# EAGLE board CT_schematic (EAGLE 7.6.0)

Size 100 x 80 mm. Coordinates in mm from the lower left corner, seen from the top.
Outline: 0,0 100,0 100,80 0,80 0,0
Copper layers (1*16): Top 0.035mm / dielectric 1.5mm / Bottom 0.035mm
Design rules "default": minimum track width 10mil, minimum drill 24mil, track to track 8mil, track to pad 8mil, pad to pad 8mil, via to via 8mil, smd to smd 8mil, copper to edge 40mil, drill to drill 8mil, minimum pad ring 10mil, minimum via ring 8mil, stop-mask expansion 4mil, vias tented up to drill 0mil, thermal gap 10mil

## Footprints (pad centres in the part's own frame; a part is rotated, then mirrored left to right if it is on the bottom)
C0603 = smd 0.8 x 0.8: 1 -0.762,0; 2 0.762,0
C0402 = smd 0.5 x 0.5: 1 -0.508,0; 2 0.508,0
C0805 = smd 1.2 x 1.3: 1 -1.016,0; 2 1.016,0
C1210 = smd 1.2 x 2.5: 1 -1.524,0; 2 1.524,0
C1206 = smd 1.3 x 1.6: 1 -1.524,0; 2 1.524,0
L0603 = smd 0.8 x 0.8: 1 -0.762,0; 2 0.762,0
DR1040 = smd 1.6 x 3.2: 1 -4.458,0; 2 4.458,0
R0603 = smd 0.8 x 0.8: 1 -0.762,0; 2 0.762,0
UFBGA132 = smd 0.32 x 0.32: A1 -2.75,2.75; A2 -2.25,2.75; A3 -1.75,2.75; A4 -1.25,2.75; A5 -0.75,2.75; A6 -0.25,2.75; A7 0.25,2.75; A8 0.75,2.75; A9 1.25,2.75; A10 1.75,2.75; A11 2.25,2.75; A12 2.75,2.75; B1 -2.75,2.25; B2 -2.25,2.25; B3 -1.75,2.25; B4 -1.25,2.25; B5 -0.75,2.25; B6 -0.25,2.25; B7 0.25,2.25; B8 0.75,2.25; B9 1.25,2.25; B10 1.75,2.25; B11 2.25,2.25; B12 2.75,2.25; C1 -2.75,1.75; C2 -2.25,1.75; C3 -1.75,1.75; C4 -1.25,1.75; C5 -0.75,1.75; C6 -0.25,1.75; C7 0.25,1.75; C8 0.75,1.75; C9 1.25,1.75; C10 1.75,1.75; C11 2.25,1.75; C12 2.75,1.75; D1 -2.75,1.25; D2 -2.25,1.25; D3 -1.75,1.25; D4 -1.25,1.25; D5 -0.75,1.25; D6 -0.25,1.25; D7 0.25,1.25; D8 0.75,1.25; D9 1.25,1.25; D10 1.75,1.25; D11 2.25,1.25; D12 2.75,1.25; E1 -2.75,0.75; E2 -2.25,0.75; E3 -1.75,0.75; E4 -1.25,0.75; E9 1.25,0.75; E10 1.75,0.75; E11 2.25,0.75; E12 2.75,0.75; F1 -2.75,0.25; F2 -2.25,0.25; F3 -1.75,0.25; F4 -1.25,0.25; F6 -0.25,0.25; F7 0.25,0.25; F9 1.25,0.25; F10 1.75,0.25; F11 2.25,0.25; F12 2.75,0.25; G1 -2.75,-0.25; G2 -2.25,-0.25; G3 -1.75,-0.25; G4 -1.25,-0.25; G6 -0.25,-0.25; G7 0.25,-0.25; G9 1.25,-0.25; G10 1.75,-0.25; G11 2.25,-0.25; G12 2.75,-0.25; H1 -2.75,-0.75; H2 -2.25,-0.75; H3 -1.75,-0.75; H4 -1.25,-0.75; H9 1.25,-0.75; H10 1.75,-0.75; H11 2.25,-0.75; H12 2.75,-0.75; J1 -2.75,-1.25; J2 -2.25,-1.25; J3 -1.75,-1.25; J4 -1.25,-1.25; J5 -0.75,-1.25; J6 -0.25,-1.25; J7 0.25,-1.25; J8 0.75,-1.25; J9 1.25,-1.25; J10 1.75,-1.25; J11 2.25,-1.25; J12 2.75,-1.25; K1 -2.75,-1.75; K2 -2.25,-1.75; K3 -1.75,-1.75; K4 -1.25,-1.75; K5 -0.75,-1.75; K6 -0.25,-1.75; K7 0.25,-1.75; K8 0.75,-1.75; K9 1.25,-1.75; K10 1.75,-1.75; K11 2.25,-1.75; K12 2.75,-1.75; L1 -2.75,-2.25; L2 -2.25,-2.25; L3 -1.75,-2.25; L4 -1.25,-2.25; L5 -0.75,-2.25; L6 -0.25,-2.25; L7 0.25,-2.25; L8 0.75,-2.25; L9 1.25,-2.25; L10 1.75,-2.25; L11 2.25,-2.25; L12 2.75,-2.25; M1 -2.75,-2.75; M2 -2.25,-2.75; M3 -1.75,-2.75; M4 -1.25,-2.75; M5 -0.75,-2.75; M6 -0.25,-2.75; M7 0.25,-2.75; M8 0.75,-2.75; M9 1.25,-2.75; M10 1.75,-2.75; M11 2.25,-2.75; M12 2.75,-2.75
ESP8266-12E = smd 2 x 1.2: 1 -7.5,7; 2 -7.5,5; 3 -7.5,3; 4 -7.5,1; 5 -7.5,-1; 6 -7.5,-3; 7 -7.5,-5; 8 -7.5,-7; 15 7.5,-7; 16 7.5,-5; 17 7.5,-3; 18 7.5,-1; 19 7.5,1; 20 7.5,3; 21 7.5,5; 22 7.5,7 | smd 1.1 x 1.7: 9 -5,-8.5; 10 -3,-8.5; 11 -1,-8.5; 12 1,-8.5; 13 3,-8.5; 14 5,-8.5
TFBGA-153 = smd 0.3 x 0.3: A1 -3.25,3.25; A2 -2.75,3.25; A3 -2.25,3.25; A4 -1.75,3.25; A5 -1.25,3.25; A6 -0.75,3.25; A7 -0.25,3.25; A8 0.25,3.25; A9 0.75,3.25; A10 1.25,3.25; A11 1.75,3.25; A12 2.25,3.25; A13 2.75,3.25; A14 3.25,3.25; B1 -3.25,2.75; B2 -2.75,2.75; B3 -2.25,2.75; B4 -1.75,2.75; B5 -1.25,2.75; B6 -0.75,2.75; B7 -0.25,2.75; B8 0.25,2.75; B9 0.75,2.75; B10 1.25,2.75; B11 1.75,2.75; B12 2.25,2.75; B13 2.75,2.75; B14 3.25,2.75; C1 -3.25,2.25; C2 -2.75,2.25; C3 -2.25,2.25; C4 -1.75,2.25; C5 -1.25,2.25; C6 -0.75,2.25; C7 -0.25,2.25; C8 0.25,2.25; C9 0.75,2.25; C10 1.25,2.25; C11 1.75,2.25; C12 2.25,2.25; C13 2.75,2.25; C14 3.25,2.25; D1 -3.25,1.75; D2 -2.75,1.75; D3 -2.25,1.75; D4 -1.75,1.75; D12 2.25,1.75; D13 2.75,1.75; D14 3.25,1.75; E1 -3.25,1.25; E2 -2.75,1.25; E3 -2.25,1.25; E5 -1.25,1.25; E6 -0.75,1.25; E7 -0.25,1.25; E8 0.25,1.25; E9 0.75,1.25; E10 1.25,1.25; E12 2.25,1.25; E13 2.75,1.25; E14 3.25,1.25; F1 -3.25,0.75; F2 -2.75,0.75; F3 -2.25,0.75; F5 -1.25,0.75; F10 1.25,0.75; F12 2.25,0.75; F13 2.75,0.75; F14 3.25,0.75; G1 -3.25,0.25; G2 -2.75,0.25; G3 -2.25,0.25; G5 -1.25,0.25; G10 1.25,0.25; G12 2.25,0.25; G13 2.75,0.25; G14 3.25,0.25; H1 -3.25,-0.25; H2 -2.75,-0.25; H3 -2.25,-0.25; H5 -1.25,-0.25; H10 1.25,-0.25; H12 2.25,-0.25; H13 2.75,-0.25; H14 3.25,-0.25; J1 -3.25,-0.75; J2 -2.75,-0.75; J3 -2.25,-0.75; J5 -1.25,-0.75; J10 1.25,-0.75; J12 2.25,-0.75; J13 2.75,-0.75; J14 3.25,-0.75; K1 -3.25,-1.25; K2 -2.75,-1.25; K3 -2.25,-1.25; K5 -1.25,-1.25; K6 -0.75,-1.25; K7 -0.25,-1.25; K8 0.25,-1.25; K9 0.75,-1.25; K10 1.25,-1.25; K12 2.25,-1.25; K13 2.75,-1.25; K14 3.25,-1.25; L1 -3.25,-1.75; L2 -2.75,-1.75; L3 -2.25,-1.75; L12 2.25,-1.75; L13 2.75,-1.75; L14 3.25,-1.75; M1 -3.25,-2.25; M2 -2.75,-2.25; M3 -2.25,-2.25; M4 -1.75,-2.25; M5 -1.25,-2.25; M6 -0.75,-2.25; M7 -0.25,-2.25; M8 0.25,-2.25; M9 0.75,-2.25; M10 1.25,-2.25; M11 1.75,-2.25; M12 2.25,-2.25; M13 2.75,-2.25; M14 3.25,-2.25; N1 -3.25,-2.75; N2 -2.75,-2.75; N3 -2.25,-2.75; N4 -1.75,-2.75; N5 -1.25,-2.75; N6 -0.75,-2.75; N7 -0.25,-2.75; N8 0.25,-2.75; N9 0.75,-2.75; N10 1.25,-2.75; N11 1.75,-2.75; N12 2.25,-2.75; N13 2.75,-2.75; N14 3.25,-2.75; P1 -3.25,-3.25; P2 -2.75,-3.25; P3 -2.25,-3.25; P4 -1.75,-3.25; P5 -1.25,-3.25; P6 -0.75,-3.25; P7 -0.25,-3.25; P8 0.25,-3.25; P9 0.75,-3.25; P10 1.25,-3.25; P11 1.75,-3.25; P12 2.25,-3.25; P13 2.75,-3.25; P14 3.25,-3.25
S29VS256RABBHW000 = smd 0.3 x 0.3: A1 -6,3; A14 0.5,3; C3 -5,2; C4 -4.5,2; C5 -4,2; C6 -3.5,2; C7 -3,2; C8 -2.5,2; C9 -2,2; C10 -1.5,2; C11 -1,2; C12 -0.5,2; D3 -5,1.5; D4 -4.5,1.5; D5 -4,1.5; D6 -3.5,1.5; D7 -3,1.5; D8 -2.5,1.5; D9 -2,1.5; D10 -1.5,1.5; D11 -1,1.5; D12 -0.5,1.5; E3 -5,1; E4 -4.5,1; E5 -4,1; E6 -3.5,1; E7 -3,1; E8 -2.5,1; E9 -2,1; E10 -1.5,1; E11 -1,1; E12 -0.5,1; F3 -5,0.5; F4 -4.5,0.5; F5 -4,0.5; F6 -3.5,0.5; F7 -3,0.5; F8 -2.5,0.5; F9 -2,0.5; F10 -1.5,0.5; F11 -1,0.5; F12 -0.5,0.5; H1 -6,-0.5; H14 0.5,-0.5
FCI_10118193-0001LF = smd 0.4 x 1.35: 1 -1.3,2.675; 2 -0.65,2.675; 3 0,2.675; 4 0.65,2.675; 5 1.3,2.675 | smd 1.6 x 1.4: 6 -3.2,2.45; 7 3.2,2.45 | smd 1.9 x 1.9: 8 -1.2,0; 9 1.2,0 | hole 0.5: -3.3,0; 3.3,0
SOT143B = smd 1 x 0.7: 1 -0.75,-1 | smd 0.6 x 0.7: 2 0.95,-1; 3 0.95,1; 4 -0.95,1
ABS07-32.768KHZ-7-T = smd 1.1 x 2.4: 1 -2.5,0; 2 0,0
ABLS-25.000MHZ-B2F-T = smd 5.6 x 2.8: 1 -3.81,0; 2 5.69,0
TSOT-23-5 = smd 1.3 x 0.62: 1 -1.31,0.95; 2 -1.31,0; 3 -1.31,-0.95; 4 1.31,-0.95; 5 1.31,0.95
SOIC-8_EP = smd 1.6 x 0.533: 1 -2.921,1.905; 2 -2.921,0.635; 3 -2.921,-0.635; 4 -2.921,-1.905; 5 2.921,-1.905; 6 2.921,-0.635; 7 2.921,0.635; 8 2.921,1.905 | smd 2.54 x 3.302: EPAD 0,0 | drill 0.406 pad 0.406: P$1 -0.508,0.635; P$2 0.381,0.635; P$3 -0.508,-0.635; P$4 0.381,-0.635
DFN8_2X3MC = smd 0.813 x 0.305: 1 -1.398,0.75; 2 -1.398,0.25; 3 -1.398,-0.25; 4 -1.398,-0.75; 5 1.398,-0.75; 6 1.398,-0.25; 7 1.398,0.25; 8 1.398,0.75 | smd 1.753 x 1.549: 9 0,0
JST-2-SMD = smd 1 x 4.6: 1 -1,-3.7; 2 1,-3.7 | smd 1.6 x 3.4: NC1 -3.4,1.5; NC2 3.4,1.5
SON-6 = smd 0.55 x 0.3: 1 -0.355,0.5 | smd 0.52 x 0.3: 2 -0.37,0; 3 -0.37,-0.5; 4 0.37,-0.5; 5 0.37,0; 6 0.37,0.5
RUT0012A = smd 0.7 x 0.2: 1 -0.7,0.8; 2 -0.7,0.4; 3 -0.7,0; 4 -0.7,-0.4; 5 -0.7,-0.8; 7 0.7,-0.8; 8 0.7,-0.4; 9 0.7,0; 10 0.7,0.4; 11 0.7,0.8 | smd 0.2 x 0.7: 6 0,-0.85; 12 0,0.85
SW_4-1437565-2 = smd 1.4 x 2.1: 1 -2.23,4.55; 2 -2.23,-4.55; 3 2.23,4.55; 4 2.23,-4.55
LGM67K-G1J2-24-Z = smd 0.8 x 1.4: A -2,0; C 0,0
NC7SZ125M5X = smd 1.3 x 0.7: 1 -1.3,0.95; 2 -1.3,0; 3 -1.3,-0.95; 4 1.3,-0.95; 5 1.3,0.95

## Placement (x,y rotation side)
C1  1e-07  [C0603]  -30.48,77.47 0 top  (outside the outline)
C2  1e-07  [C0603]  -34.29,77.47 0 top  (outside the outline)
C3  1e-07  [C0603]  -38.1,77.47 0 top  (outside the outline)
C4  1e-07  [C0603]  -41.91,77.47 0 top  (outside the outline)
C5  1e-07  [C0603]  -45.72,77.47 0 top  (outside the outline)
C6  1e-07  [C0603]  -49.53,77.47 0 top  (outside the outline)
C7  1e-07  [C0603]  -53.34,77.47 0 top  (outside the outline)
C8  4.7e-06  [C0603]  -69.85,72.39 0 top  (outside the outline)
C9  1e-07  [C0603]  -57.15,77.47 0 top  (outside the outline)
C10  1e-08  [C0603]  -60.96,77.47 0 top  (outside the outline)
C11  1e-06  [C0603]  -64.77,77.47 0 top  (outside the outline)
C12  1e-11  [C0402]  -34.29,82.55 0 top  (outside the outline)
C13  1e-11  [C0402]  -38.1,82.55 0 top  (outside the outline)
C14  1e-11  [C0402]  -41.91,82.55 0 top  (outside the outline)
C15  1e-11  [C0402]  -45.72,82.55 0 top  (outside the outline)
C16  1e-07  [C0402]  -49.53,82.55 0 top  (outside the outline)
C17  1e-05  [C0805]  -34.29,60.96 0 top  (outside the outline)
C18  1e-07  [C0402]  -53.34,82.55 0 top  (outside the outline)
C19  2.2e-06  [C0603]  -73.66,72.39 0 top  (outside the outline)
C20  2.2e-06  [C0603]  -15.24,77.47 0 top  (outside the outline)
C21  1e-07  [C0402]  -57.15,82.55 0 top  (outside the outline)
C22  1e-07  [C0402]  -60.96,82.55 0 top  (outside the outline)
C23  2.2e-06  [C0603]  -19.05,77.47 0 top  (outside the outline)
C24  1e-07  [C0402]  -64.77,82.55 0 top  (outside the outline)
C25  2.2e-06  [C0603]  -22.86,77.47 0 top  (outside the outline)
C26  1e-07  [C0402]  -68.58,82.55 0 top  (outside the outline)
C27  2.2e-06  [C0603]  -26.67,77.47 0 top  (outside the outline)
C28  1e-05  [C0805]  -39.37,60.96 0 top  (outside the outline)
C29  1e-05  [C0805]  -44.45,60.96 0 top  (outside the outline)
C30  1e-05  [C1210]  -38.1,54.61 0 top  (outside the outline)
C31  1e-05  [C1210]  -44.45,54.61 0 top  (outside the outline)
C32  1e-05  [C1210]  -50.8,54.61 0 top  (outside the outline)
C33  1e-05  [C1210]  -57.15,54.61 0 top  (outside the outline)
C34  1e-07  [C0402]  -72.39,82.55 0 top  (outside the outline)
C35  1e-05  [C1206]  -63.5,54.61 0 top  (outside the outline)
C36  1e-05  [C1206]  -69.85,54.61 0 top  (outside the outline)
C37  1e-08  [C0402]  -76.2,82.55 0 top  (outside the outline)
C38  1e-07  [C0402]  -15.24,87.63 0 top  (outside the outline)
C39  1e-08  [C0402]  -19.05,87.63 0 top  (outside the outline)
C40  1e-07  [C0402]  -22.86,87.63 0 top  (outside the outline)
C41  1e-08  [C0402]  -26.67,87.63 0 top  (outside the outline)
C42  1e-08  [C0402]  -30.48,87.63 0 top  (outside the outline)
C43  1e-08  [C0402]  -34.29,87.63 0 top  (outside the outline)
C44  1e-08  [C0402]  -38.1,87.63 0 top  (outside the outline)
F1  240.0  [L0603]  -68.58,77.47 0 top  (outside the outline)
I1  3.8e-06  [DR1040]  -35.56,35.56 0 top  (outside the outline)
R2  1000.0  [R0603]  -72.39,77.47 0 top  (outside the outline)
R4  4700.0  [R0603]  -76.2,77.47 0 top  (outside the outline)
R5  4700.0  [R0603]  -15.24,82.55 0 top  (outside the outline)
R6  4700.0  [R0603]  -19.05,82.55 0 top  (outside the outline)
R7  4700.0  [R0603]  -22.86,82.55 0 top  (outside the outline)
R8  10000.0  [R0603]  -25.4,67.31 0 top  (outside the outline)
R9  10000.0  [R0603]  -30.48,67.31 0 top  (outside the outline)
R10  10000.0  [R0603]  -35.56,67.31 0 top  (outside the outline)
R11  10000.0  [R0603]  -40.64,67.31 0 top  (outside the outline)
R12  34000.0  [R0603]  -45.72,67.31 0 top  (outside the outline)
R13  34000.0  [R0603]  -50.8,67.31 0 top  (outside the outline)
R14  34000.0  [R0603]  -55.88,67.31 0 top  (outside the outline)
R15  34000.0  [R0603]  -60.96,67.31 0 top  (outside the outline)
R16  34000.0  [R0603]  -66.04,67.31 0 top  (outside the outline)
R17  34000.0  [R0603]  -71.12,67.31 0 top  (outside the outline)
R18  34000.0  [R0603]  -76.2,67.31 0 top  (outside the outline)
R19  34000.0  [R0603]  -15.24,72.39 0 top  (outside the outline)
R20  34000.0  [R0603]  -20.32,72.39 0 top  (outside the outline)
R21  34000.0  [R0603]  -25.4,72.39 0 top  (outside the outline)
R22  10000.0  [R0603]  -30.48,72.39 0 top  (outside the outline)
R23  10000.0  [R0603]  -35.56,72.39 0 top  (outside the outline)
R24  10000.0  [R0603]  -40.64,72.39 0 top  (outside the outline)
R25  10000.0  [R0603]  -45.72,72.39 0 top  (outside the outline)
R26  490000.0  [R0603]  -69.85,60.96 0 top  (outside the outline)
R27  1000000.0  [R0603]  -64.77,60.96 0 top  (outside the outline)
R28  4031.5447154472  [R0603]  -59.69,60.96 0 top  (outside the outline)
R29  2200.0  [R0603]  -26.67,82.55 0 top  (outside the outline)
R30  10000.0  [R0603]  -50.8,72.39 0 top  (outside the outline)
R31  10000.0  [R0603]  -55.88,72.39 0 top  (outside the outline)
R32  82000.0  [R0603]  -60.96,72.39 0 top  (outside the outline)
R33  300000.0  [R0603]  -74.93,60.96 0 top  (outside the outline)
R34  120000.0  [R0603]  -15.24,67.31 0 top  (outside the outline)
R35  2000.0  [R0603]  -30.48,82.55 0 top  (outside the outline)
R36  10000.0  [R0603]  -66.04,72.39 0 top  (outside the outline)
R37  200000.0  [R0603]  -20.32,67.31 0 top  (outside the outline)
U1  STM32L152QDH6  [UFBGA132]  -25.4,36.83 0 top  (outside the outline)
U2  ESP8266-12E  [ESP8266-12E]  -21.59,12.7 0 top  (outside the outline)
U3  mtfc4gmcdm  [TFBGA-153]  -38.1,8.89 0 top  (outside the outline)
U4  S29VS256RABBHW000  [S29VS256RABBHW000]  -25.4,45.72 0 top  (outside the outline)
U5  10118193-0001LF  [FCI_10118193-0001LF]  -62.23,34.29 0 top  (outside the outline)
U6  prtr5v0u2ax  [SOT143B]  -50.8,87.63 0 top  (outside the outline)
U7  ABS07-32.768KHZ-7-T  [ABS07-32.768KHZ-7-T]  -68.58,46.99 0 top  (outside the outline)
U8  ABLS-25.000MHZ-B2F-T  [ABLS-25.000MHZ-B2F-T]  -45.72,46.99 0 top  (outside the outline)
U9  ltc3406es5  [TSOT-23-5]  -49.53,60.96 0 top  (outside the outline)
U10  MIC5234YME  [SOIC-8_EP]  -17.78,54.61 0 top  (outside the outline)
U11  MCP73831T-2ACI/MC  [DFN8_2X3MC]  -15.24,91.44 0 top  (outside the outline)
U12  S2B-PH-SM4-TB(LF)(SN)  [JST-2-SMD]  -50.8,36.83 0 top  (outside the outline)
U13  TPS3895ADRYR  [SON-6]  -69.85,86.36 0 top  (outside the outline)
U14  LSF0204DRUTR  [RUT0012A]  -64.77,87.63 0 top  (outside the outline)
U15  4-1437565-2  [SW_4-1437565-2]  -59.69,6.35 0 top  (outside the outline)
U16  Q65110A2395  [LGM67K-G1J2-24-Z]  -26.67,54.61 0 top  (outside the outline)
U17  nc7sz125m5x  [NC7SZ125M5X]  -74.93,53.34 0 top  (outside the outline)
U18  nc7sz125m5x  [NC7SZ125M5X]  -15.24,60.96 0 top  (outside the outline)
U19  nc7sz125m5x  [NC7SZ125M5X]  -21.59,60.96 0 top  (outside the outline)
U20  nc7sz125m5x  [NC7SZ125M5X]  -27.94,60.96 0 top  (outside the outline)

## Library data of the parts
C1-C44 F1 I1 R2 R4-R37 U1-U20 = circuit_tree

## Nets
CLK_CRYSTAL_U1_D1: C12.1 U1.D1 U7.1
CLK_CRYSTAL_U1_E1: C13.1 U1.E1 U7.2
CLK_CRYSTAL_U1_F1: C14.1 U1.F1 U8.1
CLK_CRYSTAL_U1_G1: C15.1 U1.G1 U8.2
GND: C1.2 C2.2 C3.2 C4.2 C5.2 C6.2 C7.2 C8.2 C9.2 C10.2 C11.2 C12.2 C13.2 C14.2 C15.2 C16.2 C17.2 C18.2 C19.2 C20.2 C21.2 C22.2 C23.2 C24.2 C25.2 C26.2 C27.2 C28.2 C29.1 C29.2 C30.2 C31.2 C32.2 C33.2 C34.2 C35.2 C36.2 C37.2 C38.2 C39.2 C40.2 C41.2 C42.2 C43.2 C44.2 R2.2 R8.2 R11.2 R26.2 R29.2 R32.2 R34.2 R35.2 U1.D3 U1.E3 U1.F2 U1.F6 U1.F7 U1.F11 U1.F12 U1.J1 U2.15 U3.C4 U3.E7 U3.G5 U3.H10 U3.K8 U3.N2 U3.N5 U3.P4 U3.P6 U4.C5 U4.D12 U4.E3 U4.F5 U5.5 U5.6 U5.7 U5.8 U5.9 U6.1 U9.2 U10.7 U10.EPAD U11.6 U11.9 U12.2 U13.2 U14.6 U16.C U17.1 U17.3 U18.1 U18.3 U19.1 U19.3 U20.1 U20.3
INPUT_USBPOWER_5V: C35.1 R36.2 U5.1 U6.4 U11.1 U11.2
NET_U1_A4: R8.1 U1.A4
NET_U1_E2: C9.1 U1.E2
NET_U1_H2: R7.1 U1.H2 U20.4
NET_U1_M1: C10.1 C11.1 F1.1 U1.L1 U1.M1
NET_U1_M5: U16.A
NET_U1_M6: U15.3 U15.4
NET_U2_1: R6.1 U2.1 U19.4
NET_U2_3: R9.1 U2.3
NET_U2_18: R10.1 U2.18
NET_U3_C2: C20.1 C21.1 U3.C2
NET_U3_K5: R4.1 U3.K5 U17.4
NET_U4_C9: U4.C9
NET_U4_D8: R5.1 U4.D8 U18.4
NET_U9_1: U9.1
NET_U9_3: I1.1 U9.3
NET_U9_5: R26.1 R27.1 U9.5
NET_U9_ATNET_3: I1.2 R27.2
NET_U10_4: R28.2 R29.1 U10.4
NET_U11_5: R36.1 U11.5
NET_U11_8: R35.1 U11.8
NET_U13_1: R31.1 R32.1 U13.1
NET_U13_3: R33.2 R34.1 U13.3
NET_U13_4: R30.1 U13.4 U17.2 U18.2 U19.2 U20.2
NET_U14_12: R37.1 U14.12
NET_U15_1: R2.1 U15.1 U15.2
PROC_FSMC_A16: U1.J11 U4.D4
PROC_FSMC_A17: U1.J10 U4.C11
PROC_FSMC_A18: U1.H12 U4.D10
PROC_FSMC_A19: U1.A1 U4.C10
PROC_FSMC_A20: U1.B1 U4.D5
PROC_FSMC_A21: U1.C2 U4.C4
PROC_FSMC_A23: U1.B2 U4.D7
PROC_FSMC_CLK: U1.B8 U4.C6
PROC_FSMC_D0: U1.H11 U4.F3
PROC_FSMC_D1: U1.H10 U4.F4
PROC_FSMC_D2: U1.C9 U4.E6
PROC_FSMC_D3: U1.B9 U4.E7
PROC_FSMC_D4: U1.M7 U4.F8
PROC_FSMC_D5: U1.L7 U4.F9
PROC_FSMC_D6: U1.M8 U4.E10
PROC_FSMC_D7: U1.L8 U4.E11
PROC_FSMC_D8: U1.M9 U4.E4
PROC_FSMC_D9: U1.L9 U4.E5
PROC_FSMC_D10: U1.M10 U4.F6
PROC_FSMC_D11: U1.M11 U4.F7
PROC_FSMC_D12: U1.M12 U4.E8
PROC_FSMC_D13: U1.K9 U4.E9
PROC_FSMC_D14: U1.K8 U4.F11
PROC_FSMC_D15: U1.J12 U4.F12
PROC_FSMC_NE2: R23.1 U1.D9 U4.D11
PROC_FSMC_NL: U1.B4 U4.D6
PROC_FSMC_NOE: R25.1 U1.B7 U4.E12
PROC_FSMC_NWAIT: R22.1 U1.B6 U4.C3
PROC_FSMC_NWE: R24.1 U1.A6 U4.C8
PROC_SDIO_CK: R21.1 U1.B10 U3.M6
PROC_SDIO_CMD: R20.1 U1.C8 U3.M5
PROC_SDIO_D0: R12.1 U1.E10 U3.A3
PROC_SDIO_D1: R13.1 U1.D12 U3.A4
PROC_SDIO_D2: R14.1 U1.B11 U3.A5
PROC_SDIO_D3: R15.1 U1.C10 U3.B2
PROC_SDIO_D4: R16.1 U1.A3 U3.B3
PROC_SDIO_D5: R17.1 U1.B3 U3.B4
PROC_SDIO_D6: R18.1 U1.E12 U3.B5
PROC_SDIO_D7: R19.1 U1.E11 U3.B6
PROC_SPI1_MISO_TOIOBUF: U14.3
PROC_SPI1_MISO_TOXCVR: U2.6 U14.9
PROC_SPI1_MOSI_TOIOBUF: U14.2
PROC_SPI1_MOSI_TOXCVR: U2.7 U14.10
PROC_SPI1_NSS_TOIOBUF: U14.5
PROC_SPI1_NSS_TOXCVR: R11.1 U2.16 U14.7
PROC_SPI1_SCK_TOIOBUF: U14.4
PROC_SPI1_SCK_TOXCVR: U2.5 U14.8
PROC_USB_DM: U1.B12 U5.2 U6.3
PROC_USB_DP: U1.A12 U5.3 U6.2
VCC_S1_3V7: C28.1 C30.1 C31.1 C36.1 U9.4 U10.5 U10.8 U11.3 U11.4 U12.1
VCC_TIER1_1V8: C1.1 C2.1 C3.1 C4.1 C5.1 C6.1 C7.1 C8.1 C18.1 C19.1 C24.1 C25.1 C26.1 C27.1 C29.2 C34.1 C39.1 C40.1 C41.1 C42.1 C43.1 C44.1 F1.2 I1.2 R4.2 R5.2 R7.2 R12.2 R13.2 R14.2 R15.2 R16.2 R17.2 R18.2 R19.2 R20.2 R21.2 R22.2 R23.2 R24.2 R25.2 R27.2 R30.2 R31.2 R33.1 R37.2 U1.C4 U1.G2 U1.G6 U1.G7 U1.G11 U1.G12 U1.H3 U3.C6 U3.M4 U3.N4 U3.P3 U3.P5 U4.C7 U4.D3 U4.F10 U13.6 U14.1 U17.5 U18.5 U19.5 U20.5
VCC_TIER1_3V3: C16.1 C17.1 C22.1 C23.1 C32.1 C33.1 C37.1 C38.1 R6.2 R9.2 R10.2 R28.1 U2.8 U3.E6 U3.F5 U3.J10 U3.K9 U10.1 U14.11

## Tracks (layer width: path | path; a pad name or v marks a point on that pad's centre or on a via)
CLK_CRYSTAL_U1_D1  (2 unrouted)
CLK_CRYSTAL_U1_E1  (2 unrouted)
CLK_CRYSTAL_U1_F1  (2 unrouted)
CLK_CRYSTAL_U1_G1  (2 unrouted)
GND  (97 unrouted)
INPUT_USBPOWER_5V  (5 unrouted)
NET_U1_A4  (1 unrouted)
NET_U1_E2  (1 unrouted)
NET_U1_H2  (2 unrouted)
NET_U1_M1  (4 unrouted)
NET_U1_M6  (1 unrouted)
NET_U2_1  (2 unrouted)
NET_U2_3  (1 unrouted)
NET_U2_18  (1 unrouted)
NET_U3_C2  (2 unrouted)
NET_U3_K5  (2 unrouted)
NET_U4_D8  (2 unrouted)
NET_U9_3  (1 unrouted)
NET_U9_5  (2 unrouted)
NET_U9_ATNET_3  (1 unrouted)
NET_U10_4  (2 unrouted)
NET_U11_5  (1 unrouted)
NET_U11_8  (1 unrouted)
NET_U13_1  (2 unrouted)
NET_U13_3  (2 unrouted)
NET_U13_4  (5 unrouted)
NET_U14_12  (1 unrouted)
NET_U15_1  (2 unrouted)
PROC_FSMC_A16  (1 unrouted)
PROC_FSMC_A17  (1 unrouted)
PROC_FSMC_A18  (1 unrouted)
PROC_FSMC_A19  (1 unrouted)
PROC_FSMC_A20  (1 unrouted)
PROC_FSMC_A21  (1 unrouted)
PROC_FSMC_A23  (1 unrouted)
PROC_FSMC_CLK  (1 unrouted)
PROC_FSMC_D0  (1 unrouted)
PROC_FSMC_D1  (1 unrouted)
PROC_FSMC_D2  (1 unrouted)
PROC_FSMC_D3  (1 unrouted)
PROC_FSMC_D4  (1 unrouted)
PROC_FSMC_D5  (1 unrouted)
PROC_FSMC_D6  (1 unrouted)
PROC_FSMC_D7  (1 unrouted)
PROC_FSMC_D8  (1 unrouted)
PROC_FSMC_D9  (1 unrouted)
PROC_FSMC_D10  (1 unrouted)
PROC_FSMC_D11  (1 unrouted)
PROC_FSMC_D12  (1 unrouted)
PROC_FSMC_D13  (1 unrouted)
PROC_FSMC_D14  (1 unrouted)
PROC_FSMC_D15  (1 unrouted)
PROC_FSMC_NE2  (2 unrouted)
PROC_FSMC_NL  (1 unrouted)
PROC_FSMC_NOE  (2 unrouted)
PROC_FSMC_NWAIT  (2 unrouted)
PROC_FSMC_NWE  (2 unrouted)
PROC_SDIO_CK  (2 unrouted)
PROC_SDIO_CMD  (2 unrouted)
PROC_SDIO_D0  (2 unrouted)
PROC_SDIO_D1  (2 unrouted)
PROC_SDIO_D2  (2 unrouted)
PROC_SDIO_D3  (2 unrouted)
PROC_SDIO_D4  (2 unrouted)
PROC_SDIO_D5  (2 unrouted)
PROC_SDIO_D6  (2 unrouted)
PROC_SDIO_D7  (2 unrouted)
PROC_SPI1_MISO_TOXCVR  (1 unrouted)
PROC_SPI1_MOSI_TOXCVR  (1 unrouted)
PROC_SPI1_NSS_TOXCVR  (2 unrouted)
PROC_SPI1_SCK_TOXCVR  (1 unrouted)
PROC_USB_DM  (2 unrouted)
PROC_USB_DP  (2 unrouted)
VCC_S1_3V7  (9 unrouted)
VCC_TIER1_1V8  (66 unrouted)
VCC_TIER1_3V3  (18 unrouted)